# Altium PCB Final PCB.PcbDoc
Units mil, origin at the board's own origin, x right, y up, seen from the top; angles counter-clockwise.
Board outline 1816.63 x 960.12 mil, 2 copper layers (Top Layer, Bottom Layer); 11 components, 6 nets, 33 pads, 0 vias.
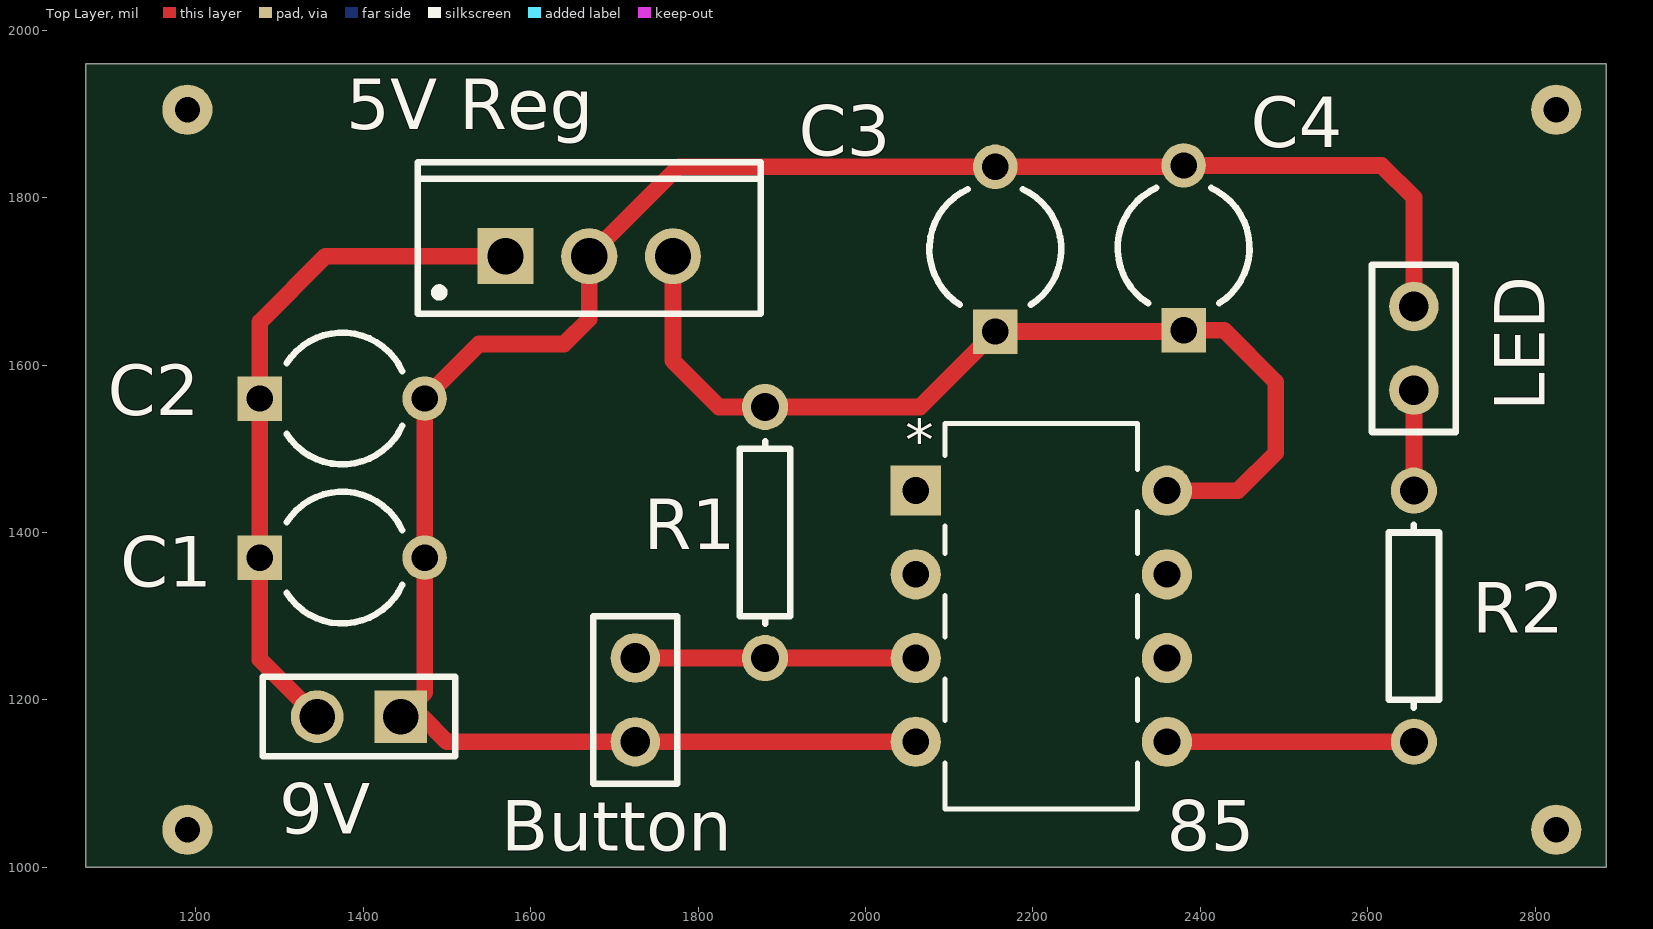
[diagram p0: Top Layer view]
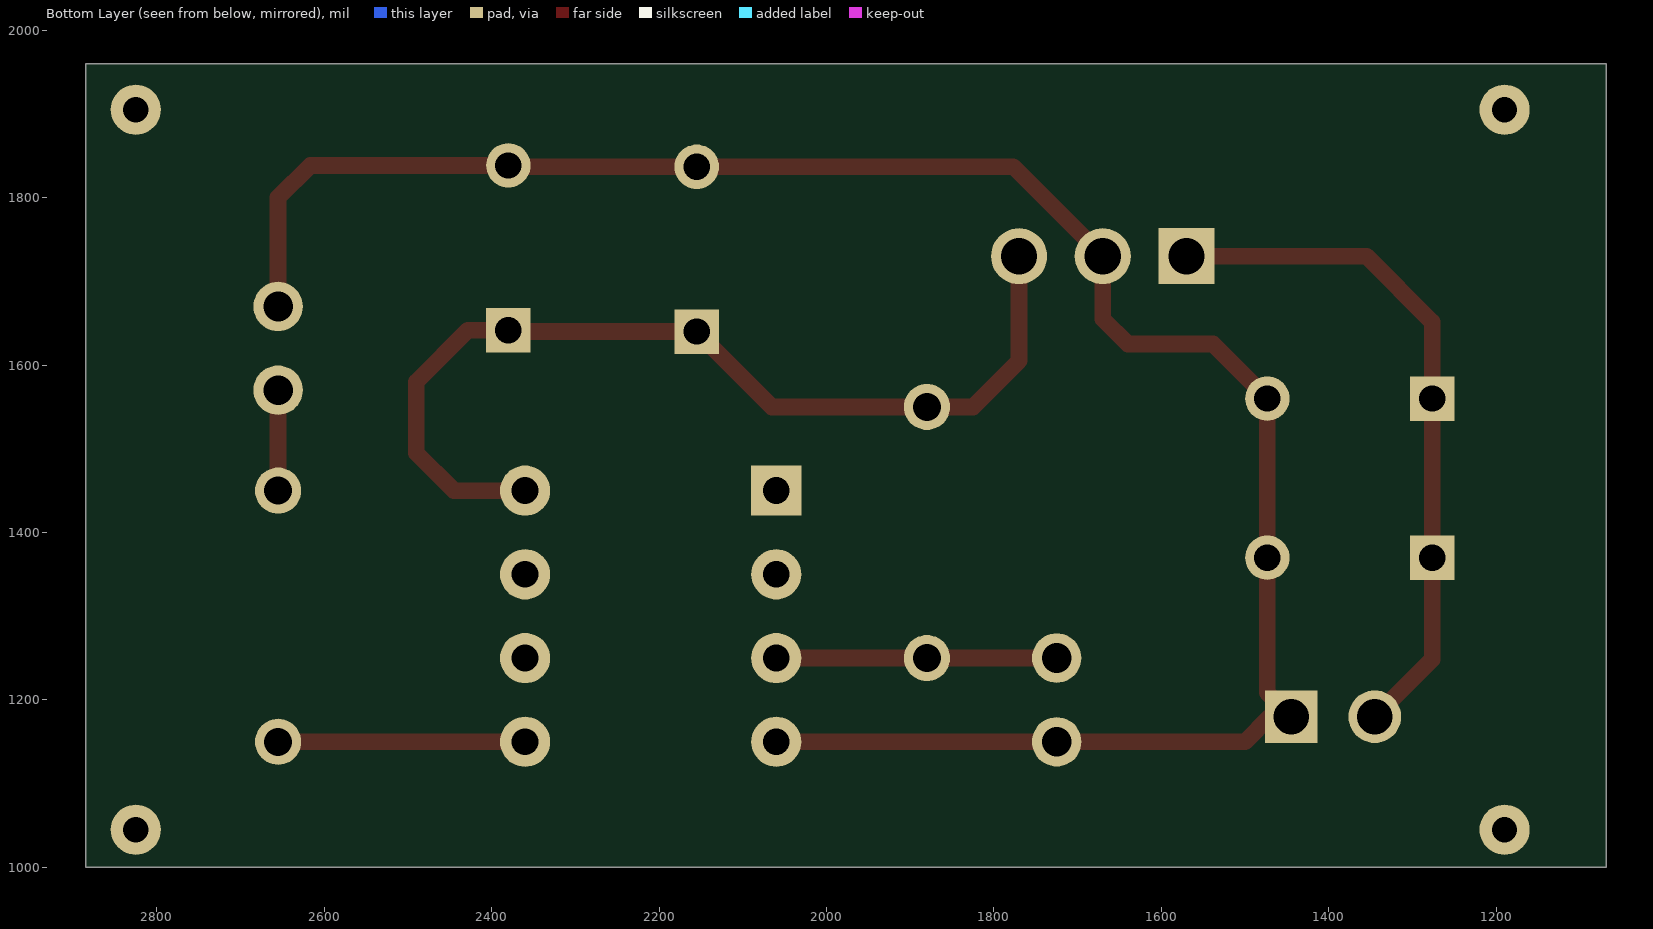
[diagram p1: Bottom Layer view, seen from below]

## Layer stack, top to bottom
Top Solder: solder mask 0.4, Solder Resist, Dk 3.5
Top Layer: signal copper 1.4
Dielectric 1: dielectric 12.6, FR-4, Dk 4.8
Bottom Layer: signal copper 1.4
Bottom Solder: solder mask 0.4, Solder Resist, Dk 3.5

## Board outline
1068.37,1000 2885,1000 2885,1960.12 1068.37,1960.12

## Design rules (kind name [scope] priority, off if disabled: settings)
Clearance Clearance_1 [All] p1: gap=10 ignorepadtopadclearanceinfootprint=FALSE except(0: Arc-Hole Track-Hole SMDPad-Hole THPad-Hole Via-Hole Fill-Hole Poly-Hole Region-Hole Text-Hole)
Clearance [All] p2: gap=10 ignorepadtopadclearanceinfootprint=FALSE except(0: Arc-Hole Track-Hole SMDPad-Hole THPad-Hole Via-Hole Fill-Hole Poly-Hole Region-Hole Text-Hole)
PolygonConnect [All] p1: connectstyle=Relief reliefconductorwidth=10 reliefentries=4 polygonreliefangle="90 Angle" airgapwidth=10
RoomDefinition PCB_Project2 [InComponentClass('PCB_Project2')] p1: confinementstyle=ConfineIn formatcopy=TRUE lockcomponents=FALSE outline 1070,995 2885,995 2885,1955 1070,1955
RoutingVias [All] p1: holewidth=28 width=50 viastyle="Through Hole" minholewidth=28 minwidth=50 maxholewidth=28 maxwidth=50
SolderMaskExpansion [All] p1: expansion=4
Width [All] p1: maxlimit=30 minlimit=10 preferedwidth=20 minimp=50.000000 maximp=50.000000 favimp=50.000000
30 further rules are at their usual default settings.

## Components (designator, comment, footprint, x,y, rotation, side; value= is the part's Value field where it differs from the comment)
"5V Reg" "L7805ACV" TO220 1670,1730 r0 top
9V "PHF-102-01-L-S-002" SMTC-PHF-102-01-X-S-002 1445,1180 r180 top
85 "ATTINY85-20PU" 8P3 2360,1150 r0 top value=Value
Button "Button" HDR1X2 1725,1250 r270 top
C1 "Cap2" CAPR5-4X5 1375,1370 r0 top value="0.1 uF"
C2 "Cap2" CAPR5-4X5 1375,1560 r0 top value="10 uF"
C3 "Cap2" CAPR5-4X5 2155,1738.43 r90 top value="0.1 uF"
C4 "Cap2" CAPR5-4X5 2380,1740 r90 top value="10 uF"
LED "2 Pin" HDR1X2 2655,1570 r90 top
R1 "10k" AXIAL-0.3 1880,1400 r90 top value=10K
R2 "100" AXIAL-0.3 2655,1300 r270 top

## Footprints (in the part's own frame and the unit in brackets; to place one, negate y for a bottom-side part, rotate by r counter-clockwise, add the part's x,y. Pads: shape width x height; smd on the part's side, far side on the other; paste and mask are expansions set on the pad)
8P3 [mil]
  rect 60x60 hole 32 mask+0: 1(-300,300)
  round 60 hole 32 mask+0: 2(-300,200) 3(-300,100) 4(-300,0) 5(0,0) 6(0,100) 7(0,200) 8(0,300)
  silkscreen extent -265,-80 -35,380, body extent 0,0 10,10, height 10
AXIAL-0.3 [mm] "Axial Device, Thru-Hole; 2 Leads; 0.3 in Pin Spacing"
  round 1.4 hole 0.85: 1(-3.81,0) 2(3.81,0)
  silkscreen extent -2.77,-0.76 2.77,0.76
CAPR5-4X5 [mm] "Capacitor; 2 Leads"
  rect 1.35x1.35 hole 0.8: 1(-2.5,0)
  round 1.35 hole 0.8: 2(2.5,0)
  silkscreen extent -1.69,-2 1.82,2
HDR1X2 [mm] "Connector; Header; 2 Position"
  round 1.5 hole 0.9: 1(0,0) 2(2.54,0)
  silkscreen extent -1.27,-1.27 3.81,1.27
SMTC-PHF-102-01-X-S-002 [mm] "Press Fit Socket Assembly, 1x2 Pins, Vertical, 2.54mm Pitch, Female"
  rect 1.6x1.6 hole 1.081: 1(0,0)
  round 1.6 hole 1.081: 2(2.54,0)
  silkscreen extent -1.65,-1.2 4.19,1.2, body extent -1.52,-1.21 4.06,1.21, height 8.51
TO220 [mm] "TO, Thru-Hole, Vertical, Heatsink Mounted; 3 In-Line Leads; Pitch 2.54 mm"
  rect 1.7x1.7 hole 1.1: 1(-2.54,0)
  round 1.7 hole 1.1: 2(0,0) 3(2.54,0)
  silkscreen extent -5.2,-1.75 5.2,2.85, body extent -5.25,-1.8 5.25,2.9, height 19.7

## Part data
"5V Reg": library part CMP-0244-00484-1, "Positive Voltage Regulator, 5V, 3-Pin TO-220", ComponentLink1Description="Manufacturer URL", ComponentLink1URL=http://www.st.com, ComponentLink2Description=Datasheet, ComponentLink2URL=http://www.st.com/internet/com/TECHNICAL_RESOURCES/TECHNICAL_LITERATURE/DATASHEET/CD00000444.pdf, ComponentLink3Description="Package Specification", ComponentLink3URL=http://www.st.com/internet/com/TECHNICAL_RESOURCES/TECHNICAL_LITERATURE/PACKAGE_INFORMATION/CD00004649.pdf, DatasheetVersion=16/11/2011, PackageDescription="TO, Thru-Hole, Vertical, Heatsink Mounted; 3 In-Line Leads; Pitch 2.54 mm", PackageReference=TO220, PackageVersion=ver3.0
9V: library part CMP-1023-00103-1, "Press Fit Socket, Through-hole, Vertical, -55 to 125 degC, 2.54 mm Pitch, 2-Pin, Female, RoHS", Manufacturer=Samtec, Temperature Range="-55 to 125 degC", ComponentLink1Description="Manufacturer URL", ComponentLink1URL=http://www.samtec.com, ComponentLink2Description=Datasheet, ComponentLink2URL=http://www.samtec.com/documents/webfiles/pdf/phf.pdf, ComponentLink3Description="Package Specification", ComponentLink3URL=http://www.samtec.com/documents/webfiles/cpdf/PHF-1XX-XX-X-X-XXX-MKT.pdf, DatasheetVersion=F-214, Mounting Technology=Through-hole, Orientation=Vertical, PackageDescription=".100 Press Fit Socket Assembly", PackageReference=PHF-102-01-X-S-002, PackageVersion="F, 9/2009", PartNumber=PHF-102-01-L-S-002, Pitch="2.54 mm", RoHS=True
85: "Imported", Built_By=EMA_UL_Team, C="Copyright (C) 2015 Accelerated Designs. All rights reserved", Manufacturer_Part_Number=ATTINY85-20PU, RefDes=RefDes, Type=DEV, Vendor=Atmel
Button LED: library part "Header 2", "Header, 2-Pin", LatestRevisionDate=17-Jul-2002, LatestRevisionNote="Re-released for DXP Platform.", Publisher="Altium Limited"
C1 C2 C3 C4: "Capacitor", PackageDescription="Capacitor; 2 Leads", PackageReference=CAPR5-4X5, Published=23-Sep-2002, Publisher="Altium Limited"
R1 R2: library part Res1, "Resistor", LatestRevisionDate=17-Jul-2002, LatestRevisionNote="Re-released for DXP Platform.", PackageDescription="Axial Device, Thru-Hole; 2 Leads; 0.3 in Pin Spacing", PackageReference=AXIAL-0.3, Published=8-Jun-2000, Publisher="Altium Limited"

## Free pads (board coordinates)
  round 60 hole 30: 2(1190,1905) 3(1190,1045) 4(2825,1905) 5(2825,1045)

## Nets (pads, with @x,y where several pads share a name; then routed paths per layer and width w, separated by ;. In a path a pad name is that pad's centre, name@x,y a point inside that pad or via, vN(x,y) a via of type N, cw(c..) or ccw(c..) an arc to the next point about the centre after c; other vN are vias at no path point)
GND: 9V.1 85.4 "5V Reg.2" Button.2 C1.2 C2.2 C3.2 C4.2 LED.2 | length 2506
  Top Layer w20: 85.4 Button.2 1500,1150 1470,1180 9V.1 1473.43,1208.43 C1.2 C2.2 1538.43,1625 1640,1625 1670,1655 1670,1730 1776.85,1836.85 C3.2 2378.43,1836.85 C4.2 2616.57,1838.43 2655,1800 LED.2
"Net5V Reg_1": 9V.2 "5V Reg.1" C1.1 C2.1 | length 825.8
  Top Layer w20: 9V.2 1276.57,1248.43 C1.1 C2.1 1276.57,1651.57 1355,1730 1570,1730
"Net5V Reg_3": 85.8 "5V Reg.3" C3.1 C4.1 R1.2 | length 1164.9
  Top Layer w20: 1770,1730 1770,1605 1825,1550 R1.2 2065,1550 C3.1 2378.43,1640 C4.1 2428.43,1641.57 2490,1580 2490,1495 2445,1450 85.8
Net85_3: 85.3 Button.1 R1.1 | length 335
  Top Layer w20: Button.1 R1.1 85.3
Net85_5: 85.5 R2.2 | length 295
  Top Layer w20: 85.5 R2.2
NetLED_1: LED.1 R2.1 | length 120
  Top Layer w20: R2.1 LED.1
pads on no net: 85.1 85.2 85.6 85.7

## Text inside footprints (layer, text, board x,y; h text height)
85: Top Overlay "*" at 2047.5,1485 h50; Mechanical 13 "*" at 2097.5,1425 h50